# Altium PCB TEMPLATE_PCB_2L.PcbDoc
Units mm, origin at the board's own origin, x right, y up, seen from the top; angles counter-clockwise.
Board outline 100 x 60 mm, 2 copper layers (Top, Bottom), stack 1.54 mm thick; 29 components, 26 nets, 126 pads, 24 vias.
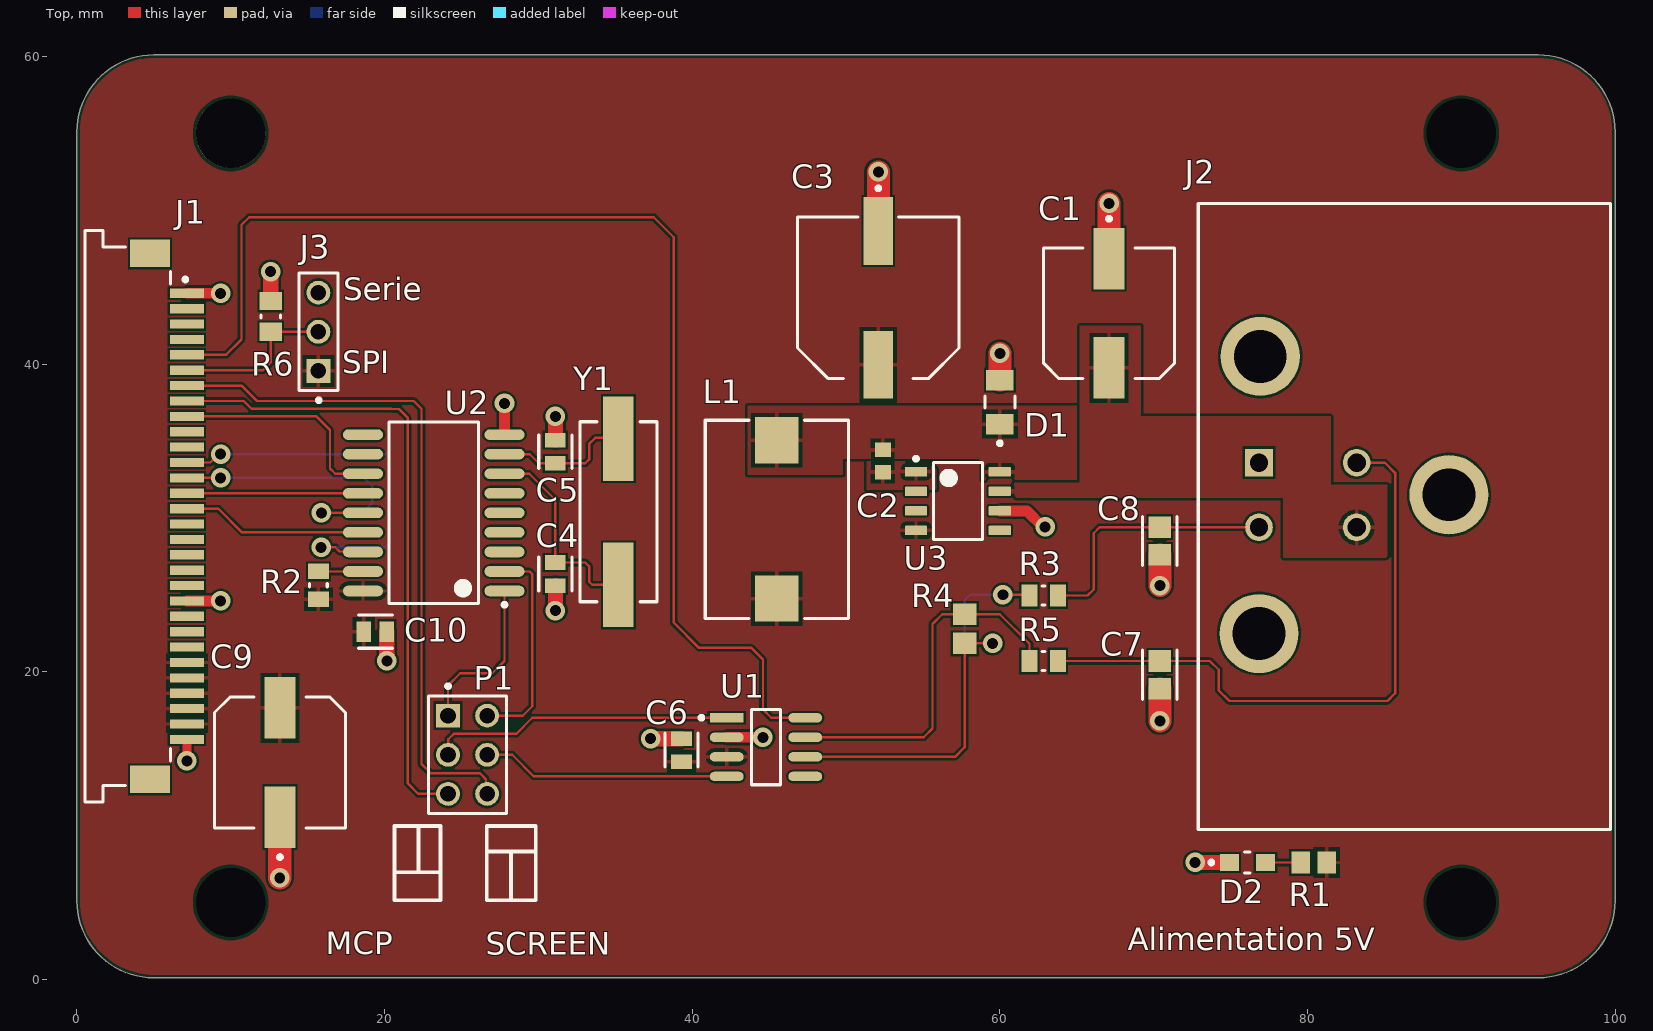
[diagram p0: Top view]
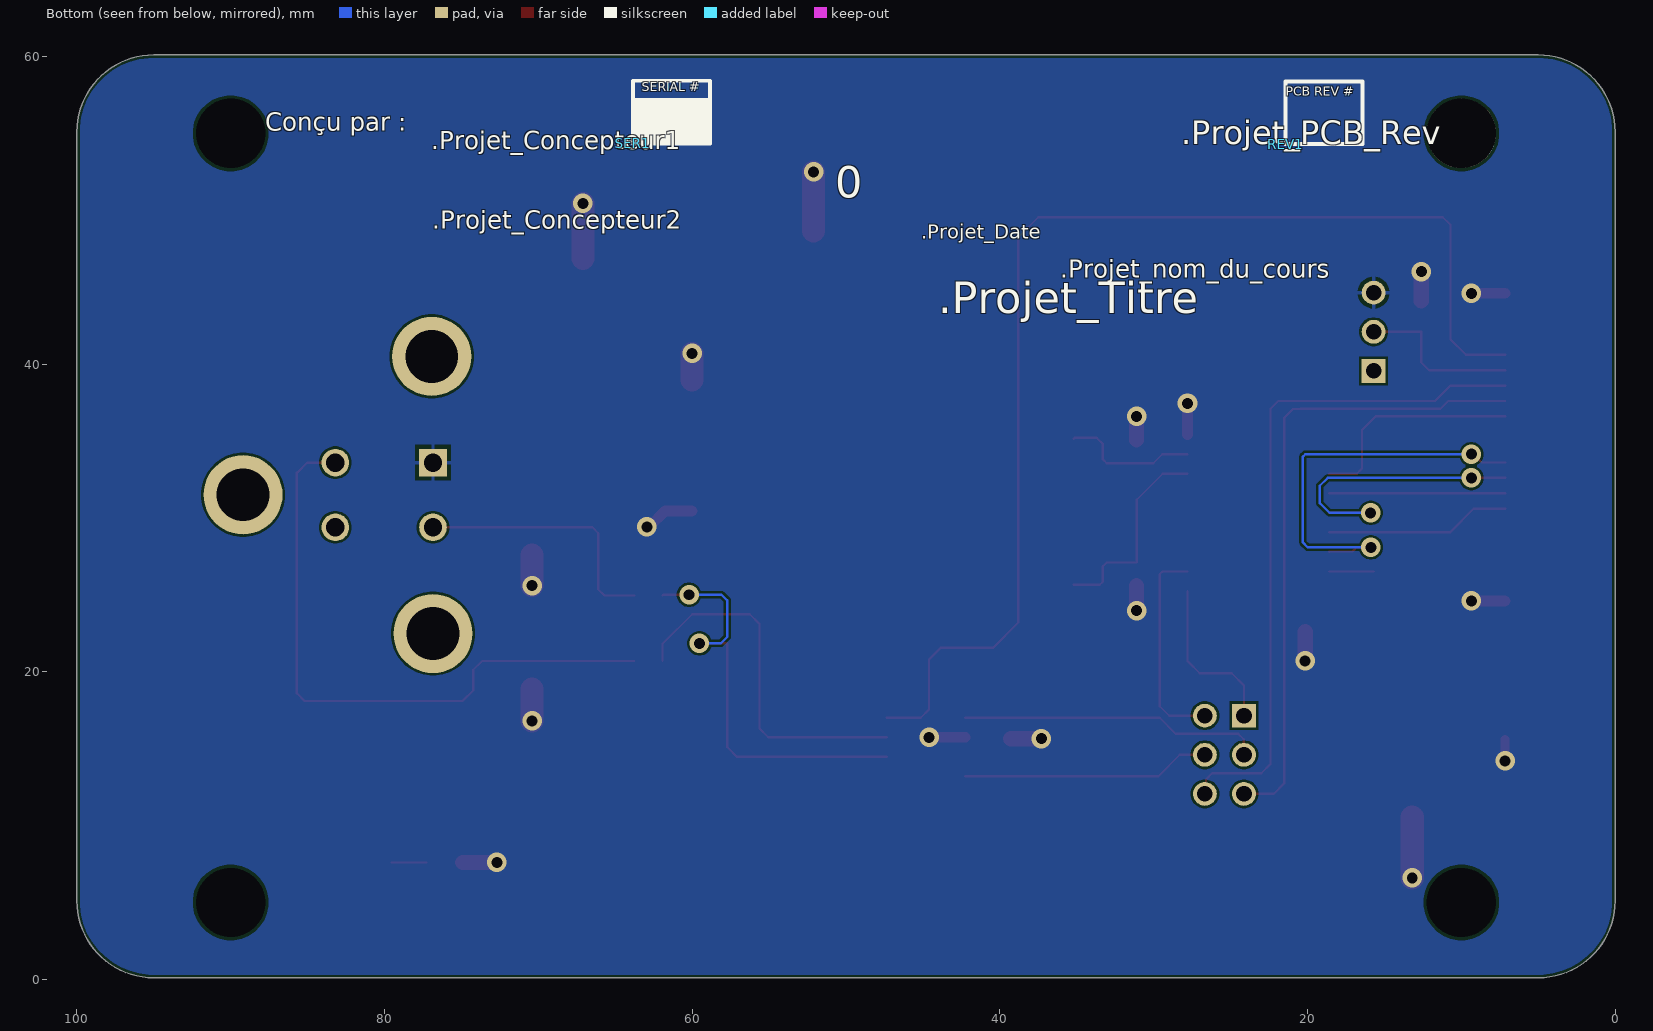
[diagram p1: Bottom view, seen from below]
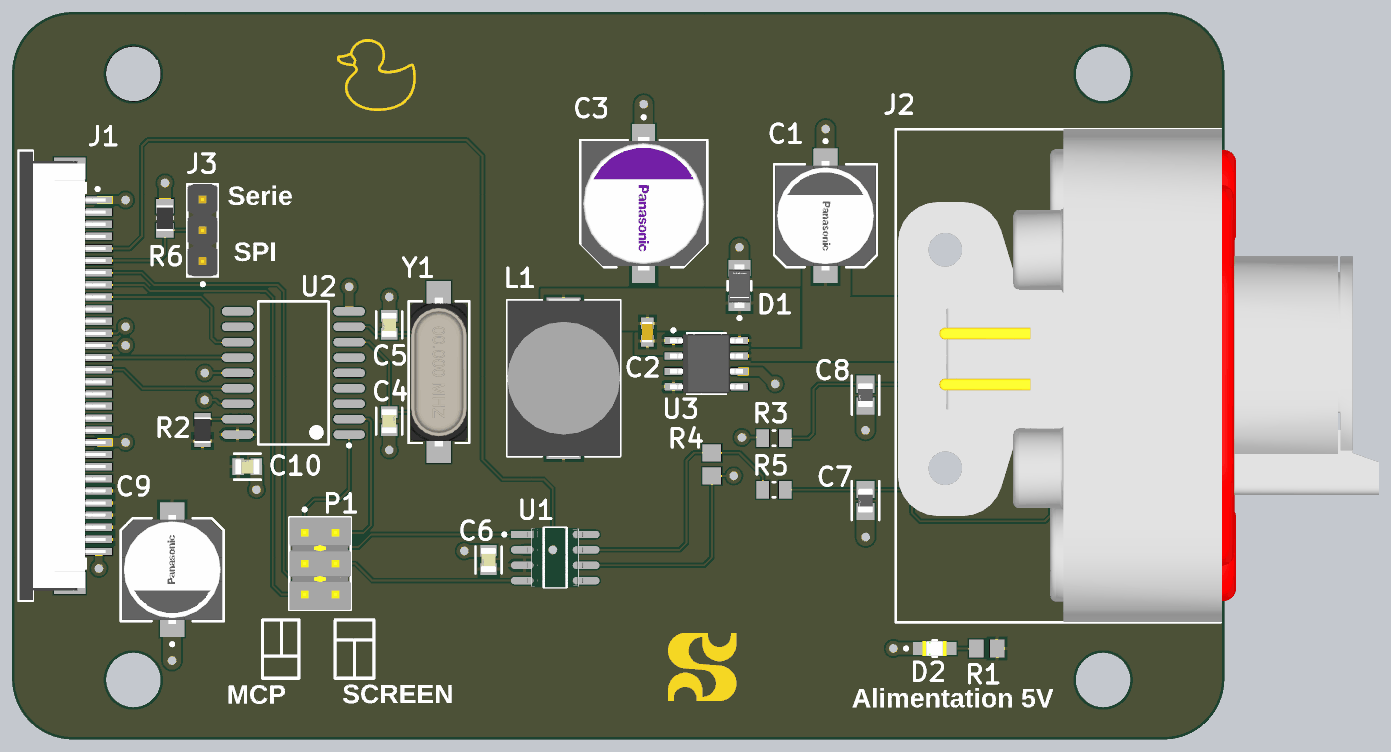
[diagram p2: 3D render of the assembled board from above, using the file's embedded part models]

## Layer stack, top to bottom
Top Solder: solder mask 0.0102, Solder Resist, Dk 3.5
Top: signal copper 0.035
Dielectric 1: core 1.47, FR-4, Dk 4.6
Bottom: signal copper 0.035
Bottom Solder: solder mask 0.0102, Solder Resist, Dk 3.5

## Board outline
0,5.1 0,55.1 cw(c5,55.1) 5,60.1 95,60.1 cw(c95,55.1) 100,55.1 100,5.1 cw(c95,5.1) 95,0.1 5,0.1 cw(c5,5.1)

## Design rules (kind name [scope] priority, off if disabled: settings)
BoardOutlineClearance [All] p1: gap=0.2 ignorepadtopadclearanceinfootprint=FALSE
Clearance [All] p1: gap=0.152 ignorepadtopadclearanceinfootprint=FALSE except(0: Text-Hole; 0.127: Arc-Arc Arc-Track Track-Track SMDPad-Fill SMDPad-Poly SMDPad-Region; 0.2: Arc-SMDPad Arc-Hole Track-SMDPad Track-Hole SMDPad-Hole THPad-Hole Via-Hole Fill-Hole Poly-Hole Region-Hole; 0.254: Arc-Via Track-Via Via-Via; 0.33: Arc-THPad Track-THPad; 0.5: THPad-THPad)
ComponentClearance [All] p1: gap=0.102 collisioncheckmode=3 verticalgap=0.102 showdistances=FALSE
Height [All] p1: minheight=0 maxheight=40 prefheight=12.7
HoleSize [All] p1: absolutevalues=TRUE maxlimit=6.3 minlimit=0.3 maxpercent=80.000 minpercent=20.000
HoleToHoleClearance [All] p1: gap=0.5 allowstackedmicrovias=FALSE
MinimumAnnularRing [All] p1: minimumring=0.13
MinimumSolderMaskSliver [All] p1: minsoldermaskwidth=0.1
PlaneClearance [All] p1: clearance=0.152
PlaneConnect [All] p1: pad.planeconnectstyle=Relief pad.reliefexpansion=0.508 pad.reliefentries=4 pad.reliefconductorwidth=0.254 pad.reliefairgap=0.254 via.planeconnectstyle=Direct via.reliefexpansion=0.508 via.reliefentries=4 via.reliefconductorwidth=0.254 via.reliefairgap=0.254
PolygonConnect [All] p1: thpad.connectstyle=Relief thpad.reliefconductorwidth=0.254 thpad.reliefentries=4 thpad.polygonreliefangle="90 Angle" thpad.airgapwidth=0.254 smdpad.connectstyle=Relief smdpad.reliefconductorwidth=0.254 smdpad.reliefentries=4 smdpad.polygonreliefangle="90 Angle" smdpad.airgapwidth=0.254 via.connectstyle=Direct via.reliefconductorwidth=0.254 via.reliefentries=4 via.polygonreliefangle="90 Angle" via.airgapwidth=0.254
RoutingVias [All] p1: holewidth=0.3 width=0.5 viastyle="Through Hole" minholewidth=0.3 minwidth=0.5 maxholewidth=6.3 maxwidth=6.5
SilkToSilkClearance [All] p1: silktosilkclearance=0.102
SilkToSolderMaskClearance [IsPad] p1: minsilkscreentomaskgap=0.024 clearancetoexposedcopper=FALSE
SolderMaskExpansion SolderMaskExpansion_Via [isVia] p1: expansion=0.102 istentingtop=TRUE
SolderMaskExpansion [All] p2: expansion=0.051 istentingtop=FALSE
Width [All] p1: maxlimit=25.4 minlimit=0.127 preferedwidth=0.152 minimp=50.000000 maximp=50.000000 favimp=50.000000
21 further rules are at their usual default settings.

## Classes and differential pairs
component class TEMPLATE_Circuit: C1 C2 C3 C4 C5 C6 C7 C8 C9 C10 D1 D2 J1 j2 J3 L1 P1 R1 R2 R3 R4 R5 R6 U1 U2 U3 Y1
component class TEMPLATE_Title: REV1 SER1

## Components (designator, comment, footprint, x,y, rotation, side; value= is the part's Value field where it differs from the comment)
C1 "100 uF" FP-FKF-MFG 67.1,43.3 r270 top
C2 "10 nF" CAPC1608X90X35ML10T15 52.4,33.7 r90 top
C3 "68 uF" FP-OS-CON-SMT-F12-MFG 52.1,44.3 r270 top
C4 "22 pF" FP-C0805C-DN-MFG 31.1,26.35 r270 top
C5 "22 pF" FP-C0805C-DN-MFG 31.1,34.3 r90 top
C6 "22 nF" FP-C0805C-DN-MFG 39.3,14.9 r90 top value="22,000 pF"
C7 "100 pF" FP-CC0805-0_1-0_7-IPC_A 70.4,19.798 r270 top
C8 "100 pF" FP-CC0805-0_1-0_7-IPC_A 70.4,28.498 r270 top
C9 "100 uF" FP-FKF-MFG 13.2,14.1 r90 top
C10 "22 nF" FP-C0805C-DN-MFG 19.4,22.6 r0 top value="22,000 pF"
D1 "SS14FL" FP-425AD-MFG 60,37.53 r90 top value=60pF
D2 "20mA FC / 2.2VF" FP-SML-210-MFG 76.1,7.6 r0 top
J1 "68613014422" 68613014422 3.3,30.1 r270 top
J2 "ATM13-4P-BM02" ATM134PBM02 76.85,33.59 r270 top (schematic designator j2)
J3 "90120-0763" FP-90120-0763-MFG 15.7,42.1 r90 top
L1 "47uF" NPI31W470MTRF 45.5,29.9 r270 top
P1 "TSW-103-07-G-D" SMTC-TSW-103-07-G-D_V 25.4,14.6 r270 top
R1 "150" RESC2013X60X40NL20T25 80.4,7.6 r0 top
R2 "10 K" RESC2013X60X35NL10T20 15.7,25.62 r270 top
R3 "10" RESC2013X50X30NL20T20 62.85,24.95 r180 top
R4 "120" RESC2013X60X40ML20T25 57.721,22.792 r270 top
R5 "10" RESC2013X50X30NL20T20 62.85,20.698 r180 top
R6 "1K" RESC2013X60X35ML10T20 12.6,43.1 r270 top
REV1 "Revision Cartridge Mini" REV_REVISION_CARTRIDGE_MINI 21.425,54.3 r180 bottom
SER1 "Serial Cartridge MICRO" SER_SERIAL_CARTRIDGE_MICRO 63.85,54.344 r180 bottom
U1 "TJA1050T/CM,118" FP-SOT96-1-IPC_A 44.8,15.1 r0 top
U2 "MCP2515-E/SO" SOIC-SO18_M 23.2,30.33 r180 top
U3 "LM2675MX-ADJ" D0008A_N 57.275,31.095 r0 top
Y1 "8 MHz" FOX-HC49SDLF_V 35.2,30.4 r270 top

## Footprints (in the part's own frame and the unit in brackets; to place one, negate y for a bottom-side part, rotate by r counter-clockwise, add the part's x,y. Pads: shape width x height; smd on the part's side, far side on the other; paste and mask are expansions set on the pad)
68613014422 [mm] "ZIF Connectors, Horizontal, Bottom Contact, pitch 1mm, 30p"
  rect 0.6x2.2 smd: 1(-14.5,3.85) 2(-13.5,3.85) 3(-12.5,3.85) 4(-11.5,3.85) 5(-10.5,3.85) 6(-9.5,3.85) 7(-8.5,3.85) 8(-7.5,3.85) 9(-6.5,3.85) 10(-5.5,3.85) 11(-4.5,3.85) 12(-3.5,3.85) 13(-2.5,3.85) 14(-1.5,3.85) 15(-0.5,3.85) 16(0.5,3.85) 17(1.5,3.85) 18(2.5,3.85) 19(3.5,3.85) 20(4.5,3.85) 21(5.5,3.85) 22(6.5,3.85) 23(7.5,3.85) 24(8.5,3.85) 25(9.5,3.85) 26(10.5,3.85) 27(11.5,3.85) 28(12.5,3.85) 29(13.5,3.85) 30(14.5,3.85)
  rect 1.8x2.6 smd: M1(-17.1,1.45) M2(17.1,1.45)
  silkscreen extent -18.58,-2.78 18.58,3.88, body extent -18.5,-2.7 18.5,4.4, height 3.02
ATM134PBM02 [mm]
  rect 1.8x1.8 hole 1.2: 1(0,0)
  round 1.8 hole 1.2: 2(4.2,0) 3(0,6.35) 4(4.2,6.35)
  round 5.145 hole 3.43: MH1(-6.91,0.08) MH2(11.11,0) MH3(2.09,12.35)
  silkscreen extent -16.86,-3.95 23.84,22.85, body extent -16.87,-3.77 23.79,35.93, height 34.33
CAPC1608X90X35ML10T15 [mm] "Chip Capacitor, 2-Leads, Body 1.7x0.9mm, IPC Low Density"
  rect 0.95x1.05 smd: 1(-0.725,0) 2(0.725,0)
  body extent -0.85,-0.45 0.85,0.45, height 0.9
D0008A_N [mm] "SOIC, 8-Leads, Body 5x4mm, Pitch 1.27mm, IPC Medium Density"
  rrect17% 1.45x0.6 smd: 1(-2.725,1.905) 2(-2.725,0.635) 3(-2.725,-0.635) 4(-2.725,-1.905) 5(2.725,-1.905) 6(2.725,-0.635) 7(2.725,0.635) 8(2.725,1.905)
  silkscreen extent -2.85,-2.5 1.6,2.88, body extent -3,-2.45 3,2.45, height 1.63
FOX-HC49SDLF_V [mm] "SMD, 2-Leads, Body 5x11.7mm"
  rect 5.5x2 smd: 1(-4.75,0) 2(4.75,0)
  silkscreen extent -5.85,-2.5 5.85,2.5, body extent -6.15,-2.35 6.15,2.35, height 4.34
FP-425AD-MFG [mm]
  rect 1.34x1.8 smd paste+0 mask+0: 1(-1.43,0) 2(1.43,0)
  silkscreen extent -2.8,-0.97 0.39,0.97, body extent -2.2,-1.07 2.2,1.07, height 0.25
FP-90120-0763-MFG [mm]
  rect 1.55x1.55 hole 1 paste-2539.97 mask+0: 1(-2.54,0)
  round 1.55 hole 1 paste-2539.97 mask+0: 2(0,0) 3(2.54,0)
  silkscreen extent -4.57,-1.27 3.81,1.27, body extent -3.91,-1.37 3.91,1.37, height 0.25
FP-C0805C-DN-MFG [mm]
  rect 0.95x1.35 smd paste+0 mask+0: 1(-0.75,0) 2(0.75,0)
  silkscreen extent -1.1,-1.07 1.1,1.07, body extent -1.4,-0.85 1.4,0.85, height 0.25
FP-CC0805-0_1-0_7-IPC_A [mm]
  rect 1.408x1.462 smd paste+0 mask+0: 1(-0.902,0) 2(0.902,0)
  silkscreen extent -1.61,-1.13 1.61,1.13, body extent -2.11,-1.23 2.11,1.23, height 0.25
FP-FKF-MFG [mm]
  rect 4x2 smd paste+0 mask+0: 1(-3.55,0) 2(3.55,0)
  silkscreen extent -6.27,-4.25 4.25,4.25, body extent -5.8,-4.5 5.8,4.5, height 0.25
FP-OS-CON-SMT-F12-MFG [mm]
  rect 4.4x1.9 smd paste+0 mask+0: 1(-4.35,0) 2(4.35,0)
  silkscreen extent -7.25,-5.25 5.25,5.25, body extent -6.8,-5.5 6.8,5.5, height 0.25
FP-SML-210-MFG [mm]
  rect 1.25x1.1 smd paste+0 mask+0: 1(-1.175,0) 2(1.175,0)
  silkscreen extent -2.47,-0.67 0.18,0.67, body extent -1.9,-0.77 1.9,0.77, height 0.25
FP-SOT96-1-IPC_A [mm]
  rect 2.204x0.608 smd paste+0 mask+0: 1(-2.551,1.905)
  rrect100% 2.204x0.608 smd paste+0 mask+0: 2(-2.551,0.635) 3(-2.551,-0.635) 4(-2.551,-1.905) 5(2.551,-1.905) 6(2.551,-0.635) 7(2.551,0.635) 8(2.551,1.905)
  silkscreen extent -4.33,-2.45 0.95,2.45, body extent -4.15,-2.95 4.15,2.95, height 0.25
NPI31W470MTRF [mm]
  rect 3x2.8 smd: 1(-5.15,0) 2(5.15,0)
  silkscreen extent -6.45,-4.65 6.45,4.65, body extent -6.5,-4.65 6.5,4.65, height 5.1
RESC2013X50X30NL20T20 [mm] "Chip Resistor, 2-Leads, Body 2.00x1.25mm, IPC Medium Density"
  rect 1.05x1.45 smd: 1(-0.925,0) 2(0.925,0)
  silkscreen extent -0.1,-0.63 0.1,0.63, body extent -1.1,-0.72 1.1,0.72, height 0.5
RESC2013X60X35ML10T20 [mm] "Chip Resistor, 2-Leads, Body 2.1x1.35mm, IPC Low Density"
  rect 1.2x1.45 smd: 1(-1,0) 2(1,0)
  silkscreen extent -0.1,-0.63 0.1,0.63, body extent -1.05,-0.68 1.05,0.67, height 0.6
RESC2013X60X35NL10T20 [mm] "Chip Resistor, 2-Leads, Body 2.1x1.35mm, IPC Medium Density"
  rect 1x1.35 smd: 1(-0.9,0) 2(0.9,0)
  silkscreen extent -0.1,-0.58 0.1,0.58, body extent -1.05,-0.68 1.05,0.67, height 0.6
RESC2013X60X40ML20T25 [mm] "Chip Resistor, 2-Leads, Body 2.00x1.25mm, IPC Low Density"
  rect 1.4x1.55 smd: 1(-0.95,0) 2(0.95,0)
  body extent -1.1,-0.72 1.1,0.72, height 0.6
RESC2013X60X40NL20T25 [mm] "Chip Resistor, 2-Leads, Body 2.00x1.25mm, IPC Medium Density"
  rect 1.2x1.45 smd: 1(-0.85,0) 2(0.85,0)
  body extent -1.1,-0.72 1.1,0.72, height 0.6
REV_REVISION_CARTRIDGE_MINI [mm]
  silkscreen extent 0,0 5,4.08
SER_SERIAL_CARTRIDGE_MICRO [mm]
  silkscreen extent 0,0 5.02,4.08
SMTC-TSW-103-07-G-D_V [mm] "THD, 6-Leads, Body 7.62x5.08mm, Pitch 2.54mm"
  rect 1.55x1.55 hole 1.02: 1(-2.54,-1.27)
  round 1.55 hole 1.02: 2(-2.54,1.27) 3(0,-1.27) 4(0,1.27) 5(2.54,-1.27) 6(2.54,1.27)
  silkscreen extent -4.58,-2.54 3.81,2.54, body extent -3.81,-2.54 3.81,2.54, height 8.38
SOIC-SO18_M [mm] "SOIC, 18-Leads, Body 11.6x7.5mm, Pitch 1.27mm, IPC Low Density"
  oval 2.6x0.7 smd: 1(-4.6,5.08) 2(-4.6,3.81) 3(-4.6,2.54) 4(-4.6,1.27) 5(-4.6,0) 6(-4.6,-1.27) 7(-4.6,-2.54) 8(-4.6,-3.81) 9(-4.6,-5.08) 10(4.6,-5.08) 11(4.6,-3.81) 12(4.6,-2.54) 13(4.6,-1.27) 14(4.6,0) 15(4.6,1.27) 16(4.6,2.54) 17(4.6,3.81) 18(4.6,5.08)
  silkscreen extent -4.72,-5.9 2.9,6.1, body extent -3.8,-5.87 3.8,5.87, height 2.65

## Part data
C1 C9: library part CMP-2000-06208-3, "CAP ALUM 100UF 20% 50V SMD", Capacitance=100uF, Case/Package=Radial, Dielectric Material=Aluminium, ESR (Equivalent Series Resistance)=340mR, Leakage Current=3uA, Max Operating Temperature=105°C, Min Operating Temperature=-55°C, Package Quantity=1, Ripple Current=350mA, Tolerance=20%, Voltage=50V, Construction=Cylindrical, Contact Plating=Tin, Diameter=8mm, Height=10.2mm, Height - Seated (Max)=0.402inch, Impedance=340mR, Lead Free="Lead Free", Length=10.2mm, Life (Hours)=2000Hour, Material=Aluminium, Mount="Surface Mount", Number of Pins=2, Packaging="Tape and Reel", Radiation Hardening=No, REACH SVHC="No SVHC", Ripple Current (AC)=350mA, RoHS Compliant=Yes, Series=FK, Termination=SMD/SMT, Voltage Rating=50V, Voltage Rating (DC)=50V, Width=10mm
C2: library part CMP-2100-03642-1, "Chip Capacitor, 10 nF, +/- 10%, 50 V, -55 to 125 degC, 0603 (1608 Metric), RoHS, Tape and Reel", Capacitance=10nF, Case Code (Imperial)=0603, Case Code (Metric)=1608, Dielectric=X7R, Dielectric Material=Ceramic, Insulation Resistance=10GR, Manufacturer=Murata, Max Operating Temperature=125degC, Min Operating Temperature=-55degC, Package Description="2-Pin Surface Mount Device, Body 1.6 x 0.8 mm", Package Quantity=1, Tolerance=10%, Voltage=50V, Case/Package=0603, Datasheet URL=http://search.murata.co.jp/Ceramy/image/img/A01X/G101/ENG/GRM188R71H103KA01-01.pdf, Datasheet Version=42401.0, Depth=0.8mm, Height=0.8mm, Lead Free=LeadFree, Length=1.6mm, Manufacturer URL=http://www.murata.com/, Material=Ceramic, Mount=SurfaceMount, Number of Pins=2, Package Reference=0603, Packaging=TapeandReel, REACH SVHC=Unknown, RoHSCompliant=True, Termination=SMD/SMT, Thickness=0.035inch, Voltage Rating=50V, Voltage Rating (DC)=50V, Width=0.031inch
C3: library part CMP-05428-000631-1, "Conductive Polymer Aluminum Solid Capacitors (OS-CON) 68uF ±20% 50V RADIAL SMT 10x12.6mm", Capacitance=68uF, Case/Package=Radial, ESR (Equivalent Series Resistance)=20mR, Leakage Current=680uA, Max Operating Temperature=105°C, Min Operating Temperature=-55°C, Package Quantity=400, Ripple Current=4.3A, Tolerance=20%, Voltage=50V, Construction=Cylindrical, Diameter=10mm, Dissipation Factor=12%, Height=12.6mm, Height - Seated (Max)=0.5inch, Lead Free="Lead Free", Length=12.6mm, Life (Hours)=5000Hour, Mount="Surface Mount", Number of Pins=12, Packaging="Tape and Reel", Polarity=Polar, REACH SVHC="No SVHC", Ripple Current (AC)=4.3A, RoHS Compliant=Yes, Series="OS-CON™, SVPF", Termination=SMD/SMT, Voltage Rating=50V, Voltage Rating (DC)=50V
C4 C5: library part CMP-2007-00048-2, "Capacitor; Ceramic; Cap; 22.0pF; Tol 5%; SMT; Vol-Rtg 50V; C0G; Tape and Reel", Manufacturer=KEMET, Manufacturer Part Number=C0805C220J5GACTU, Package=C0805C-DN, Temperature="-55°C to +125°C", Temperature Characteristic=C0G, Temperature Coefficient=30ppm/°C, Temperature Range High=+125°C, Temperature Range Low=-55°C, Tolerance=0.05, Voltage Rating="50 V", Automotive=No, Capacitance="22 pF", Category=Cap, ComponentLink2Description=Datasheet, ComponentLink2URL=https://content.kemet.com/datasheets/KEM_C1003_C0G_SMD.pdf, Device Class L1="Passive Components", Device Class L2=Capacitors, Device Class L3="Ceramic Capacitors", Digikey Description="Capacitor; Ceramic; Cap; 22.0pF; Tol 5%; SMT; Vol-Rtg 50V; C0G; Tape and Reel", Height=0.88mm, Ipc Land Pattern Name=CAPC200125X78, Lead Free=Yes, Material=Ceramic, Mouser Description="Multilayer Ceramic Capacitors MLCC - SMD/SMT 50volts 22pF C0G 5%", Octopart=https://octopart.com/c0805c220j5gactu-kemet-145470, RoHS=TRUE
C6 C10: library part CMP-2007-00338-2, "CAP CER 0.022UF 50V X7R 0805", Capacitance="22,000 pF", Manufacturer=KEMET, Manufacturer Part Number=C0805C223K5RACTU, Package=C0805C-DN, Temperature="-55°C to +125°C", Temperature Characteristic=X7R, Temperature Coefficient=30ppm/°C, Temperature Range High=+125°C, Temperature Range Low=-55°C, Tolerance=0.1, Voltage Rating="50 V", Automotive=No, Category=Cap, ComponentLink2Description=Datasheet, ComponentLink2URL=https://content.kemet.com/datasheets/KEM_C1003_C0G_SMD.pdf, Device Class L1="Passive Components", Device Class L2=Capacitors, Device Class L3="Ceramic Capacitors", Digikey Description="CAP CER 0.022UF 50V X7R 0805", Height=0.88mm, Ipc Land Pattern Name=CAPC200125X78, Lead Free=Yes, Material=Ceramic, Mouser Description="Capacitor; Ceramic; Cap; .022uF; Tol 10%; SMT; Vol-Rtg 50V; X7R; Tape and Reel", Octopart=https://octopart.com/c0805c223k5ractu-kemet-145968, RoHS=TRUE
C7 C8: library part CMP-03422-001508-1, "CAP CER 100PF 50V C0G/NPO 0805", Capacitance=100pF, Case Code (Imperial)=0805, Case Code (Metric)=2012, Dielectric=C0G, Dielectric Material=Ceramic, Insulation Resistance=100GR, Max Operating Temperature=125°C, Min Operating Temperature=-55°C, Package Quantity=1, Temperature Coefficient=30ppm/°C, Tolerance=5%, Voltage=50V, Case/Package=0805, Depth=1.25mm, Height=0.6mm, Lead Free="Lead Free", Length=2mm, Mount="Surface Mount", Number of Pins=2, Packaging="Tape and Reel", Radiation Hardening=No, REACH SVHC="No SVHC", Resistor Type=Ceramic, RoHS Compliant=Yes, Series=CC, Termination=SMD/SMT, Thickness=0.024inch, Voltage Rating=50V, Voltage Rating (DC)=50V, Width=1.25mm
D1: library part CMP-07162-000013-1, "DIODE SCHOTTKY 40V 1A SOD123F", Capacitance=60pF, Forward Current=1A, Manufacturer="ON Semiconductor", Max Junction Temp=+125°C, Max Repetitive Reverse Voltage=40V, Max Surge Forward Current=40A, Package=425AD, Peak Reverse Current=30uA, Temperature="-55°C to +125°C", Temperature Range Low=-55°C, Automotive=No, Category=Diode, ComponentLink2Description=Datasheet, ComponentLink2URL=https://www.onsemi.com/pub/Collateral/SS14FL-D.PDF, Device Class L1="Discrete Semiconductors", Device Class L2=Diodes, Device Class L3="Schottky Diodes", Digikey Description="DIODE SCHOTTKY 40V 1A SOD123F", Height=1.08mm, Lead Free=Yes, Manufacturer Part Number=SS14FL, Mouser Description="SS14FL Series 40 V 1 A Surface Mount Schottky Barrier Rectifier - SOD-123F", Octopart=https://octopart.com/ss14fl-on+semiconductor-84331601, Reverse Voltage=40V, RoHS=TRUE, Temperature Range High=+125°C
D2: library part CMP-08952-000013-1, "LED GREEN CLEAR 0805 SMD", Colour=Green, Forward Current=20mA, Forward Voltage=2.2V, Manufacturer=ROHM, Manufacturer Part Number=SML-210MTT86, Package=SML-210, Power Dissipation=70mW, Reverse Voltage=4V, Temperature="-30°C to +85°C", Temperature Range High=+85°C, Temperature Range Low=-30°C, Automotive=No, Category=Diode, ComponentLink2Description=Datasheet, ComponentLink2URL=https://www.mouser.in/ds/2/348/sml-21-313092.pdf, Device Class L1=Optoelectronics, Device Class L2=LEDs, Device Class L3=unset, Digikey Description="LED GREEN CLEAR 0805 SMD", Height=0.90mm, Ipc Land Pattern Name=DIOCP200125X25, Lead Free=Yes, Led Orientation="Top View", Luminous Intensity=16mcd, Mouser Description="Standard LEDs - SMD GREEN SMD TRANS LENS", Octopart=https://octopart.com/sml-210mtt86-rohm-550711, Peak Emmision Wavelength=573nm, RoHS=TRUE, Wavelength=570nm
J1: library part CMP-1502-01467-2, Contact Resistance=20mΩ, Current Rating=1A, Flammability Rating="UL94 V-0", Insulation Resistance=100MΩ, Max Operating Temperature=85°C, Min Operating Temperature=-25°C, Operating Supply Voltage=125V, Actuator Material=Polyphenylene, Contact Material="Bronze, Tin", Contact Plating=Tin, Gender=Receptacle, Housing Material=Polyphenylene, Lead Pitch=1mm, Length=37mm, Mount="Surface Mount", NexarPartId=22802282, Number of Contacts=30, Number of Pins=30, Number of Positions=30, Number of Rows=1, Orientation=Horizontal, Packaging="Tape and Reel", Pitch=1mm, REACH SVHC=Unknown, RoHS=Compliant, Termination=Solder, Voltage Rating=125V, Width=3mm
J3: library part CMP-04776-000084-1, "CONN HEADER VERT 3POS 2.54MM", Current Rating=3A, Manufacturer=Molex, Temperature="-55°C to +125°C", Temperature Range High=+125°C, Temperature Range Low=-55°C, Voltage Rating=350V, Automotive=No, Category=Conn, ComponentLink2Description=Datasheet, ComponentLink2URL=https://www.molex.com/webdocs/datasheets/pdf/en-us/0901200763_PCB_HEADERS.pdf, Conn Gender=Male, Conn Orientation=Vertical, Contact Material=Gold,Nickel, Device Class L1=Connectors, Device Class L2="Headers and Wire Housings", Device Class L3=unset, Digikey Description="CONN HEADER VERT 3POS 2.54MM", Footprint Url=https://www.molex.com/pdm_docs/sd/901200763_sd.pdf, Height=5.8mm, Lead Free=Yes, Manufacturer Part Number=90120-0763, Mouser Description="Board-To-Board Connector, C-Grid III 90120 Series, Through Hole, Header, 3, 2.54 mm", Number of Contacts=3, Number of Rows=1, Octopart=https://octopart.com/90120-0763-molex-655433, Package=90120-0763, Pitch=2.54mm, RoHS=TRUE
L1: library part TEMPLATE_Circuit
P1: library part CMP-2000-07329-1, "Through Hole Header, Pitch 2.54 mm, 2 x 3 Position, Height 8.58 mm, Tail Length 2.54 mm, -55 to 125 degC, RoHS, Bulk", Color=Black, Manufacturer=Samtec-Inc., Package Description="Through Hole Header, Pitch 2.54 mm, 2 x 3 Position, Height 8.58 mm, Tail Length 2.54 mm", Category=Connectors,Interconnects, Connector Type=Header,Unshrouded, Contact Finish=Gold, Contact Finish Thickness=10µin(0.25µm), Contact Mating Length="0.230\"(5.84mm)", Contact Type=MalePin, Datasheet URL=http://suddendocs.samtec.com/catalog_english/tsw_th.pdf, Datasheet Version=12/2015, Family=RectangularConnectors-Headers,MalePins, Fastening Type=-, Features=-, Manufacturer URL=http://www.samtec.com/, Mounting Technology=ThroughHole, Mounting Type=ThroughHole, Number of Positions=6, Number of Positions Loaded=All, Number of Rows=2, Package Reference=TSW-103-07-G-D, Package URL=http://suddendocs.samtec.com/prints/tsw-xxx-xx-xxx-x-xx-xxx-mkt.pdf, Packaging=Bulk, Pitch="0.100\"(2.54mm)", Row Spacing="0.100\"(2.54mm)", Series=TSW, Termination=Solder
R1: library part CMP-2001-00596-1, Manufacturer=Panasonic, Part Number=ERA6AEB151V
R2: library part CMP-1659-00013-4, "Chip Resistor, 10 KOhm, +/- 1%, 0.125 W, -55 to 155 degC, 0805 (2012 Metric), RoHS, Tape and Reel", Manufacturer=Yageo, Max Operating Temperature="155 degC", Min Operating Temperature="-55 degC", Package Quantity=5000, Voltage Rating="150 V", ComponentLink1Description="Manufacturer URL", ComponentLink1URL=http://www.yageo.com/, ComponentLink2Description=Datasheet, ComponentLink2URL=http://www.yageo.com/documents/recent/PYu-RC_Group_51_RoHS_L_04.pdf, DatasheetVersion="Rev. 4, 02/2016", Height="0.5 mm", Length="2 mm", Mount="Surface Mount", Mounting Technology="Surface Mount", PackageDescription="2-Pin Surface Mounted Device, Body 2 x 1.25 mm", PackageReference=0805, Packaging="Tape and Reel", Pins=2, REACH SVHC="No SVHC", RoHSCompliant=true
R3 R5: library part CMP-2001-04915-1, Manufacturer="Vishay Dale", Part Number=CRCW080510R0FKEA
R4: library part CMP-2001-00588-1, Manufacturer=Panasonic, Part Number=ERA6AEB121V
R6: library part CMP-2100-03671-1, "Chip Resistor, 1 KOhm, +/- 1%, 125 mW, -55 to 155 degC, 0805 (2012 Metric), RoHS, Tape and Reel", Case Code (Imperial)=0805, Case Code (Metric)=2012, Manufacturer=Yageo, Max Operating Temperature=155degC, Max Power Dissipation=125mW, Min Operating Temperature=-55degC, Package Description="2-Pin Surface Mounted Device, Body 2 x 1.25 mm", Package Quantity=1, Resistance=1KOhm, Temperature Coefficient=100ppm/degreesC, Tolerance=1%, Voltage Rating=150V, Case/Package=0805, Composition=ThickFilm, Datasheet URL=http://www.yageo.com/NewPortal/yageodocoutput?fileName=/pdf/R-Chip/PYu-RC_Group_51_RoHS_L_5.pdf, Datasheet Version="Rev. 5, 10/2016", Depth=1.25mm, Height=0.024inch, Lead Free=LeadFree, Length=0.079inch, Manufacturer URL=http://www.yageo.com/, Military Standard=Not, Number of Pins=2, Number of Terminations=2, Package Reference=0805, Packaging=TapeandReel, Power Rating=125mW, REACH SVHC=Unknown, RoHSCompliant=true, Termination=SMD/SMT, Voltage Rating (DC)=150V, Width=0.049inch
REV1: library part CMP-008-000037-1, "REV - REVISION CARTRIDGE MINI", Assembly Type=NONE, COLLISIONCHECKMODE=3, Component Type="Standard (No BOM)", Design Item ID=REV_REVISION_CARTRIDGE_MINI, GAP=0mil, LAYERKIND=SameLayer, NETSCOPE=AnyNet, Pin Count=0, Rule=UNIONINDEX=0, RULEKIND=ComponentClearance, SHOWDISTANCES=FALSE, Source=CEGEP_SHERBROOKE_TGE_LIBRARY.SchLib, UNIT=Imperial, VERTICALGAP=0mil
SER1: library part CMP-008-000042-1, "SER - SERIAL CARTRIDGE MICRO", Assembly Type=NONE, COLLISIONCHECKMODE=3, Component Type="Standard (No BOM)", Design Item ID=SER_SERIAL_CARTRIDGE_MICRO, GAP=0mil, LAYERKIND=SameLayer, NETSCOPE=AnyNet, Pin Count=0, Rule=UNIONINDEX=0, RULEKIND=ComponentClearance, SHOWDISTANCES=FALSE, Source=CEGEP_SHERBROOKE_TGE_LIBRARY.SchLib, UNIT=Imperial, VERTICALGAP=0mil
U1: library part CMP-2000-04923-2, "IC TRANSCEIVER HALF 1/1 8SO", Case/Package=SO, Max Operating Temperature=150°C, Max Supply Current=10mA, Max Supply Voltage=5.25V, Min Operating Temperature=-40°C, Min Supply Voltage=4.75V, Package Quantity=2500, Contact Plating=Gold, Data Rate=1Mbps, Interface=CAN, Lead Free="Lead Free", Mount="Surface Mount", Nominal Supply Current=10mA, Number of Pins=8, Number of Receive Buffers=1, Number of Transceivers=1, Number of Transmit Buffers=1, Packaging="Tape and Reel", Radiation Hardening=No, REACH SVHC="No SVHC", Receiver Hysteresis=70mV, Simplex/Duplex="Half Duplex"
U2: library part CMP-0186-00035-2, "Stand-Alone CAN Controller With SPI Interface, 18-Pin SOIC, Extended Temperature", Code_JEDEC=MS-013, ComponentLink1Description="Manufacturer URL", ComponentLink1URL=http://www.microchip.com/, ComponentLink2Description=Datasheet, ComponentLink2URL=http://ww1.microchip.com/downloads/en/DeviceDoc/21801f.pdf, ComponentLink3Description="Package Specification", ComponentLink3URL=http://www.microchip.com/stellent/groups/techpub_sg/documents/packagingspec/en012702.pdf, DatasheetVersion="revF, Oct-2010", PackageDescription="18-Lead Plastic Small Outline (SO) - Wide 7.50mm Body [SOIC]", PackageReference=SOIC-SO18, PackageVersion="revBB, Aug-2009", RevisionNote="URLs added. DatasheetVersion updated."
U3: library part CMP-0069-00674-3, "SIMPLE SWITCHER® Power Converter High Efficiency 1A Step-Down Voltage Regulator, 8-pin Narrow SOIC", Manufacturer="Texas Instruments", PackageTopMarking=NSZXTT*2675*MADJ, PowerWise=N, Code_IPC=SOIC127P600-8, Code_JEDEC=MS-012-AA, ComponentLink1Description="Datasheet URL", ComponentLink1URL=http://www.ti.com/general/docs/lit/getliterature.tsp?genericPartNumber=LM2675&fileType=pdf, CompType=Switcher, PackageDescription="SOIC Narrow, 4.9 x 3.9 x 1.45mm, 8 Lead, 1.27mm Pitch", PackageReference=D0008A, PinCount=8, RoHS=N
Y1: library part CMP-2100-03639-1, "Resistance Weld Crystal, 8 MHz, +/- 30 ppm, -20 to 70 degC, 2-Pin SMD, RoHS, Tape and Reel", Case/Package=SMD/SMT, ESR (Equivalent Series Resistance)=80Ohm, Frequency=8MHz, Frequency Stability=50ppm, Frequency Tolerance=30ppm, Load Capacitance=20pF, Manufacturer="FOX Electronics", Max Operating Temperature=70degC, Min Operating Temperature=-20degC, Package Description="2-Pin Surface Mount Device, Body 5 x 11.7 mm", Package Quantity=1000, Package Reference=HC49SDLF, Datasheet URL=http://www.foxonline.com/pdfs/hc49sdlf.pdf, Datasheet Version=42064.0, Depth=5mm, Height=4.5mm, Lead Free=LeadFree, Length=11.7mm, Manufacturer URL=http://www.foxonline.com/, Mount=SurfaceMount, Number of Pins=2, Packaging=TapeandReel, Radiation Hardening=No, REACH SVHC=NoSVHC, RoHSCompliant=True, Series Resistance=80Ohm, Termination=SMD/SMT, Tolerance=50ppm, Width=5mm

## Free pads (board coordinates)
  round 1.524 hole 4.5 unplated: ""(10,5) ""(90,5) ""(90,55)
  round 4.5 hole 4.5 unplated: ""(10,55)

## Via types
v1: diameter 1.27, hole 0.711, Top to Bottom, tented both sides, 24 vias

## Nets (pads, with @x,y where several pads share a name; then routed paths per layer and width w, separated by ;. In a path a pad name is that pad's centre, name@x,y a point inside that pad or via, vN(x,y) a via of type N, cw(c..) or ccw(c..) an arc to the next point about the centre after c; other vN are vias at no path point)
+5: C3.2 C6.1 C9.2 C10.1 J1.25 J1.26 J1.27 J1.28 J1.29 J3.1 L1.2 R1.2 R2.2 U1.3 U2.18 U3.4
+12: C1.2 J2.4 U3.7
CLOCK: J1.14 U2.13 | length 11.5
  Top w0.152: J1.14 U2.13
CS: J1.12 U2.16 | length 26.4
  Top w0.152: J1.12 8.669,33.6 9.209,34.14 v1(9.35,34.14) ; v1(15.877,28.088) 16.798,28.088 17.071,27.815 18.575,27.815 U2.16
  Bottom w0.152: v1(9.35,34.14) 20.15,34.14 20.3,33.99 20.3,28.4 19.988,28.088 v1(15.877,28.088)
Enable: J1.5 U1.8 | length 78.3
  Top w0.152: J1.5 9.7,40.6 10.7,41.6 10.7,45.2 10.701,45.201 10.701,49.051 11.2,49.55 37.5,49.55 38.8,48.25 38.8,23.2 40.45,21.55 43.851,21.55 44.6,20.801 44.6,17.55 45.145,17.005 U1.8
GND: C1.1 C3.1 C4.2 C5.2 C6.2 C7.2 C8.2 C9.1 C10.2 D1.2 D2.1 J1.1 J1.21 J1.30 J2.1 J3.3 R6.1 U1.2 U2.9 U3.6 | length 42
  Top w0.152: C9.1@13.189,10.539 C9.1 ; C4.2 C4.2@31.111,25.589 ; C5.2 C5.2@31.111,35.061 ; U3.6 U3.6@60.018,30.442 ; C1.1 C1.1@67.111,46.861 ; C7.2 C7.2@70.411,18.885
  Top w0.6: v1(7.15,14.2) J1.30
  Top w0.7: J1.21 v1(9.35,24.6) ; J1.1 v1(9.35,44.6) ; U2.9 v1(27.8,37.438) ; U1.2 v1(44.6,15.735) ; U3.6@60.018,30.442 61.775,30.442 62.796,29.422 v1(62.95,29.422)
  Top w1: R6.1 v1(12.6,46.01) ; v1(20.15,20.7) C10.2 ; v1(31.111,23.97) C4.2@31.111,25.589 ; C5.2@31.111,35.061 v1(31.111,36.6) ; v1(37.3,15.65) C6.2 ; v1(72.7,7.6) D2.1
  Top w1.5: v1(13.189,6.6) C9.1@13.189,10.539 ; C3.1 v1(52.1,52.5) ; D1.2 v1(60,40.7) ; C1.1@67.111,46.861 v1(67.111,50.45) ; v1(70.4,25.6) C8.2 ; v1(70.411,16.798) C7.2@70.411,18.885
GPIO_3: J1.7 P1.6 | length 44.6
  Top w0.152: J1.7 10.701,38.6 11.701,37.6 21.9,37.6 22.4,37.1 22.4,14 23.002,13.398 26.202,13.398 26.6,13 26.6,12.13 P1.6
GPIO_4: J1.8 P1.5 | length 41.5
  Top w0.152: J1.8 10.85,37.6 11.35,37.1 20.448,37.1 20.465,37.083 20.937,37.083 21.5,36.52 21.5,12.756 22.196,12.06 P1.5
INT: J1.9 U2.12 | length 14.5
  Top w0.152: J1.9 15.57,36.6 16.45,35.72 16.45,33.22 16.8,32.87 U2.12
MISO: J1.15 U2.15 | length 12.1
  Top w0.152: J1.15 9.2,30.6 10.74,29.06 U2.15
MOSI: J1.13 U2.14 | length 19.7
  Top w0.152: J1.13 v1(9.35,32.6) ; v1(15.888,30.33) U2.14
  Bottom w0.152: v1(9.35,32.6) 18.686,32.6 19.2,32.086 19.2,30.961 18.569,30.33 v1(15.888,30.33)
NetC2_1: C2.1 U3.1
NetC2_2: C2.2 D1.1 L1.1 U3.8
NetC4_1: C4.1 U2.7 Y1.2 | length 13.4
  Top w0.152: U2.7 29.405,32.87 31.1,31.175 C4.1 33.05,27.1 33.3,26.85 33.3,25.85 33.5,25.65 Y1.2
NetC5_1: C5.1 U2.8 Y1.1 | length 8.9
  Top w0.152: U2.8 29.435,34.14 30.025,33.55 C5.1 33.05,33.55 33.3,33.8 33.3,34.8 33.7,35.2 35.15,35.2 Y1.1
NetC7_1: C7.1 J2.3 R5.1 | length 41.1
  Top w0.152: R5.1 63.777,20.7 C7.1 73.652,20.7 74.23,20.122 74.23,18.789 74.925,18.094 85.194,18.094 85.7,18.6 85.7,32.927 85.037,33.59 J2.3
NetC8_1: C8.1 J2.2 R3.1 | length 17.1
  Top w0.152: R3.1 65.705,24.95 66.1,25.345 66.1,29 66.5,29.4 C8.1 70.41,29.39 J2.2
NetD2_2: D2.2 R1.1 | length 2.3
  Top w0.152: D2.2 R1.1
NetJ1_6: J1.6 J3.2 R6.2 | length 10.8
  Top w0.152: J1.6 12.1,39.6 12.6,40.1 R6.2 J3.2
NetR2_1: R2.1 U2.17 | length 2.9
  Top w0.152: R2.1 U2.17
NetR3_2: R3.2 R4.2 U1.6 | length 27.9
  Top w0.152: U1.6 57.086,14.465 57.721,15.1 R4.2 v1(59.526,21.842) ; v1(60.202,25.005) 61.87,25.005 R3.2
  Bottom w0.152: v1(59.526,21.842) 58.142,21.842 57.721,22.262 57.721,24.636 58.09,25.005 v1(60.202,25.005)
NetR4_1: R4.1 R5.2 U1.7 | length 23.8
  Top w0.152: U1.7 55.056,15.735 55.621,16.3 55.621,23.101 56.262,23.742 R4.1 59.997,23.742 61.925,21.814 R5.2
RX_MCP: P1.2 U2.2 | length 13.7
  Top w0.152: P1.2 28.99,17.14 29.6,17.75 29.6,26.35 29.43,26.52 U2.2
RX_TJA: P1.4 U1.4 | length 16.2
  Top w0.152: P1.4 28.297,14.6 29.702,13.195 U1.4
TX_MCP: P1.1 U2.1 | length 10.8
  Top w0.152: P1.1 24.13,19.11 24.92,19.9 27,19.9 27.8,20.7 U2.1
TX_TJA: P1.3 U1.1 | length 19.7
  Top w0.152: P1.3 24.145,14.615 24.145,15.604 24.5,15.959 28.559,15.959 29.605,17.005 U1.1
pads on no net: J1.2 J1.3 J1.4 J1.10 J1.11 J1.16 J1.17 J1.18 J1.19 J1.20 J1.22 J1.23 J1.24 J1.M1 J1.M2 J2.MH1 J2.MH2 J2.MH3 U1.5 U2.3 U2.4 U2.5 U2.6 U2.10 U2.11 U3.2 U3.3 U3.5

## Polygon pours and split planes (outlines as drawn)
+5 on Top "+5_L01_P008" (solid, pour order 8): 0,5 0,55 cw(c5,55) 5,60 95,60 cw(c95,55) 100,55 100,5 cw(c95,5) 95,0 5,0 cw(c5,5)
+12 on Top "+12_L01_P000" (solid, pour order 0): 78.43,31.3 78.43,27.4 85.104,27.4 85.202,27.498 85.202,32.144 81.516,32.144 81.5,32.161 81.5,36.6 69.1,36.6 69.169,36.669 69.169,42.5 65.2,42.5 65.2,32.3 59.025,32.3 59.025,31.3
NetC2_1 on Top "NETC2_1_L01_P002" (solid, pour order 2): 51.35,33.845 55.198,33.845 55.878,33.165 55.878,31.825 51.35,31.825
NetC2_2 on Top "NETC2_2_L01_P001" (solid, pour order 1): 58.875,32.436 65,32.436 65,37.3 43.6,37.3 43.6,32.8 49.8,32.8 49.8,33.845 58.625,33.845 58.875,33.595
GND on Bottom "GND_L02_P006" (solid, pour order 6): 0,5 0,55 cw(c5,55) 5,60 95,60 cw(c95,55) 100,55 100,5 cw(c95,5) 95,0 5,0 cw(c5,5)

## Silkscreen, mask and mechanical layers (free items; w line width, h text height)
Top Overlay:
  lines w0.254: 20.648,9.966 22.219,9.966 ; 20.648,9.966 20.648,6.966 22.219,6.966 ; 20.648,9.966 23.648,9.966 ; 20.648,9.966 20.648,5.144 23.648,5.144 23.648,9.966 ; 22.219,6.966 22.219,9.966 ; 22.219,6.966 23.648,6.966 23.648,9.966 ; 22.219,6.966 22.219,9.966 ; 22.219,9.966 23.648,9.966 ; 26.648,5.144 28.229,5.144 ; 26.648,5.144 26.648,8.316 28.229,8.316 ; 26.648,5.144 29.833,5.144 ; 26.648,5.144 26.648,9.966 29.833,9.966 29.833,5.144 ; 28.229,5.144 29.833,5.144 ; 28.229,5.144 28.229,8.316 ; 28.229,5.144 28.229,8.316 ; 28.229,8.316 29.833,8.316 29.833,5.144
  text "Serie" at 17.323,43.668 h2.5
  text "SPI" at 17.266,38.906 h2.5
  text "Alimentation 5V" at 68.326,1.4 h2.5
  text "MCP" at 16.177,1.153 h2.5
  text "SCREEN" at 26.587,1.112 h2.5
Bottom Overlay:
  text "Conçu par :" at 87.75,54.778 h2
  text ".Projet_Concepteur1" at 76.977,53.566 h2
  text "0" at 50.707,50.128 h3.5
  text ".Projet_Concepteur2" at 76.9,48.4 h2
  text ".Projet_Date" at 45.1,48.153 h0.91
  text ".Projet_nom_du_cours" at 36.079,45.209 h2
  text ".Projet_Titre" at 44.009,42.62 h3.5
Top Solder:
  drawing of 2 lines, arcs and shapes, not listed
Board Outline:
  lines w0.254: 0,5 ccw(c5,5) 5,0 95,0 ccw(c95,5) 100,5 100,55 ccw(c95,55) 95,60 5,60 ccw(c5,55) 0,55 0,5

## Dimensions
5,0 to 5,60 on Measure
90,55 to 95,60 on Measure
100,5 to 0,5 on Measure
90,55 to 100,55 on Measure
90,5 to 100,5 on Measure
5,60 to 10,55 on Measure
10,55 to 0,55 on Measure
10,5 to 0,5 on Measure
90,5 to 95,0 on Measure
10,5 to 5,0 on Measure
10,55 to 90,55 on Measure
10,5 to 90,5 on Measure
90,5 to 90,55 on Measure

## Text inside footprints (layer, text, board x,y; h text height)
REV1: Bottom Overlay "PCB REV #" at 21.425,57.25 h1
SER1: Bottom Overlay "SERIAL #" at 63.287,57.536 h1